# Altium PCB G4Mini-V3.PcbDoc
Units mil, origin at the board's own origin, x right, y up, seen from the top; angles counter-clockwise.
Board outline 2362.2 x 1259.84 mil, 4 copper layers (Top Layer, GND, PWR, Bottom Layer), stack 23.756 mil thick; 46 components, 54 nets, 268 pads, 175 vias.
Unrouted connection lines stored in the file: 18.
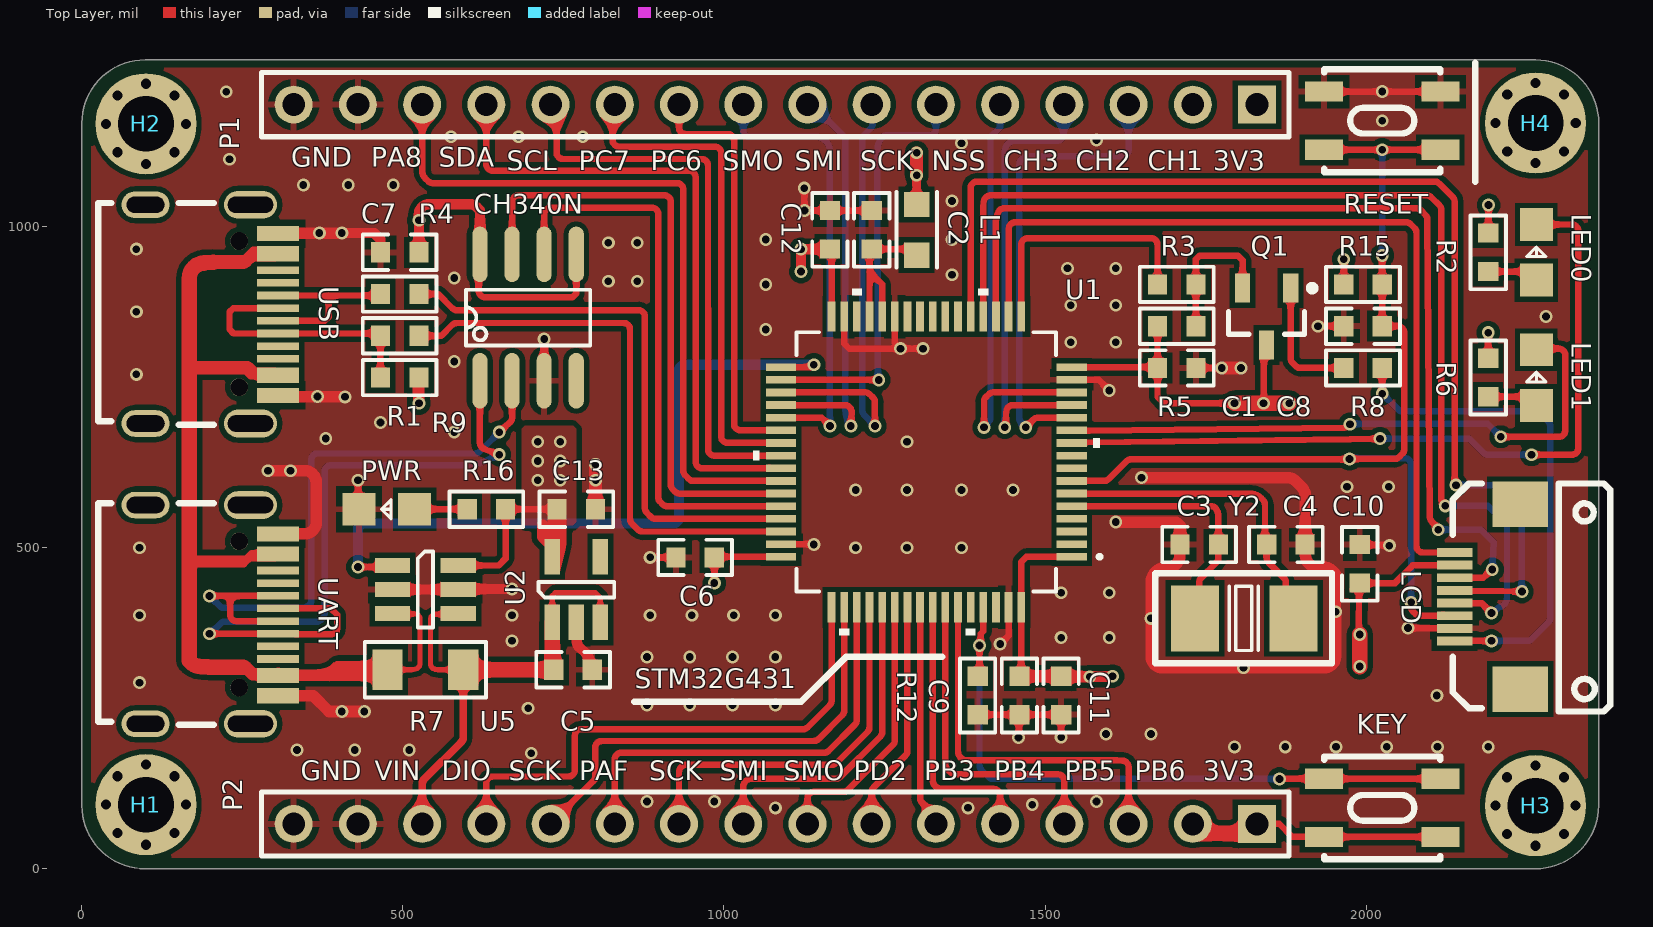
[diagram p0: Top Layer view]
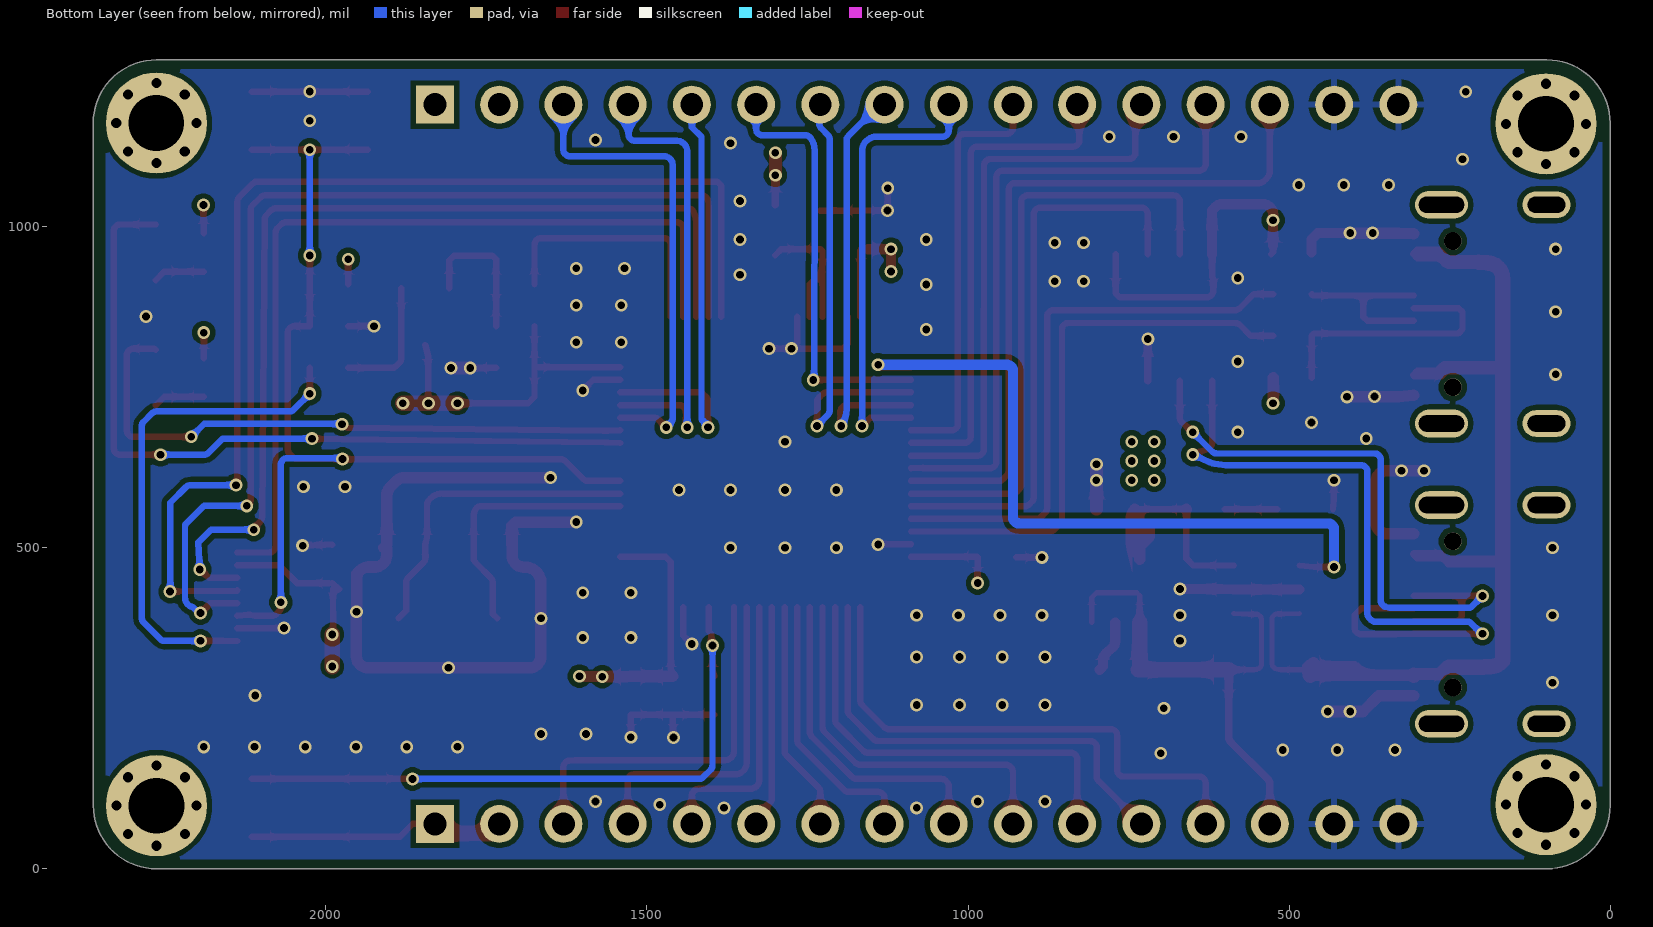
[diagram p1: Bottom Layer view, seen from below]
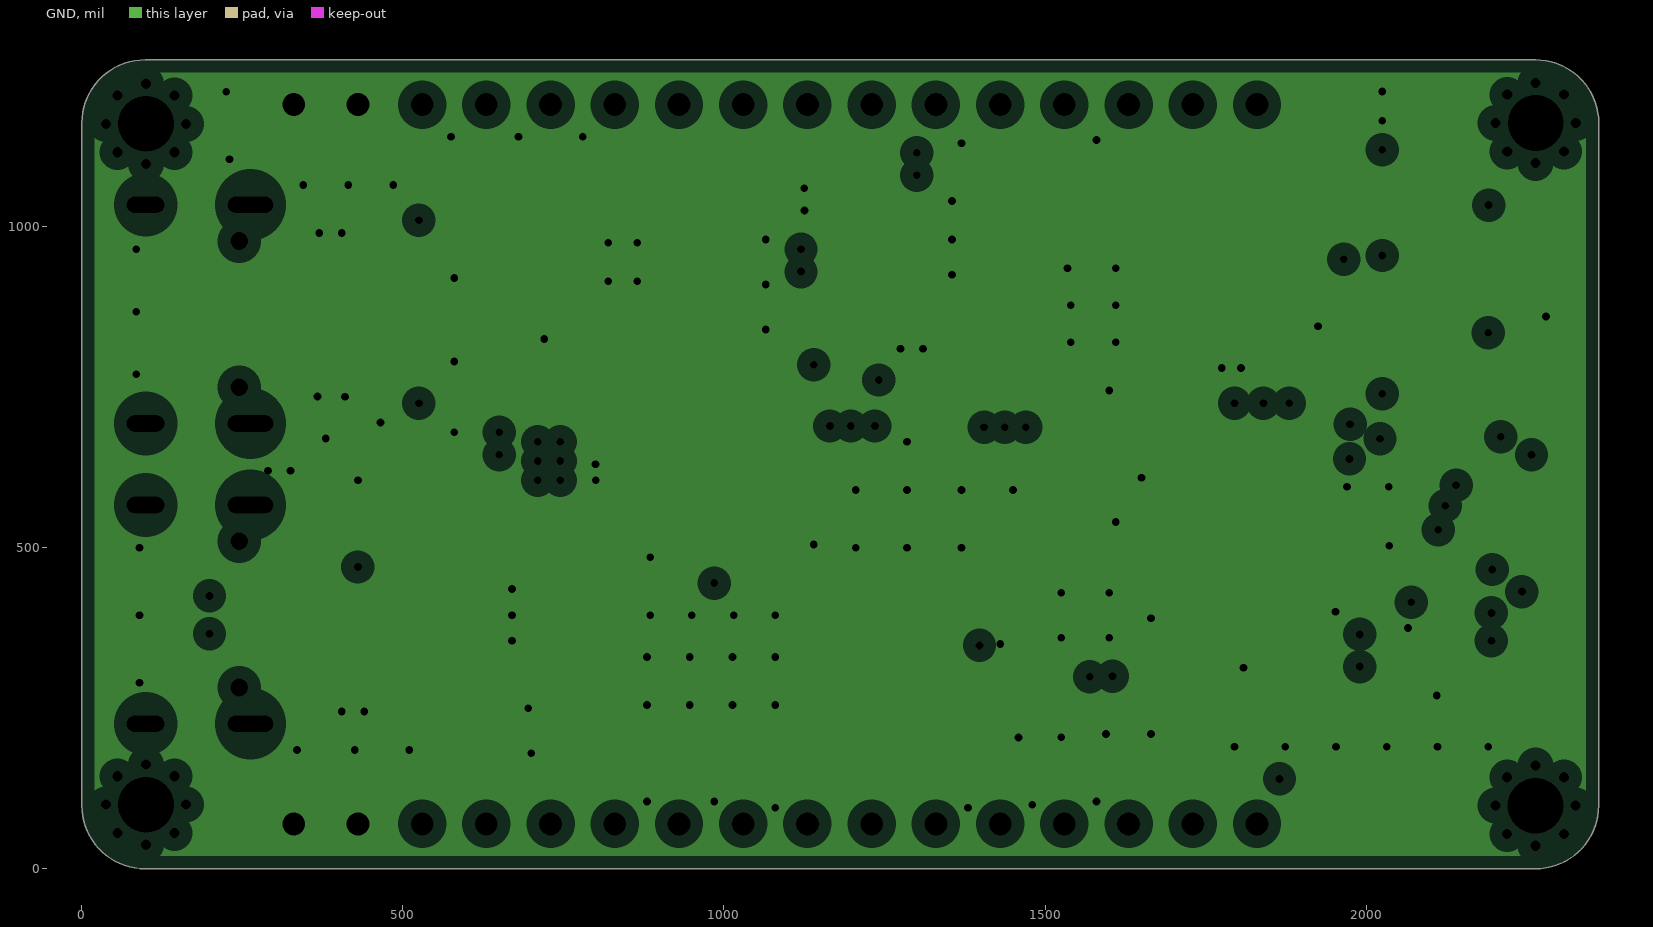
[diagram p2: GND, clearances drawn from the general rule]
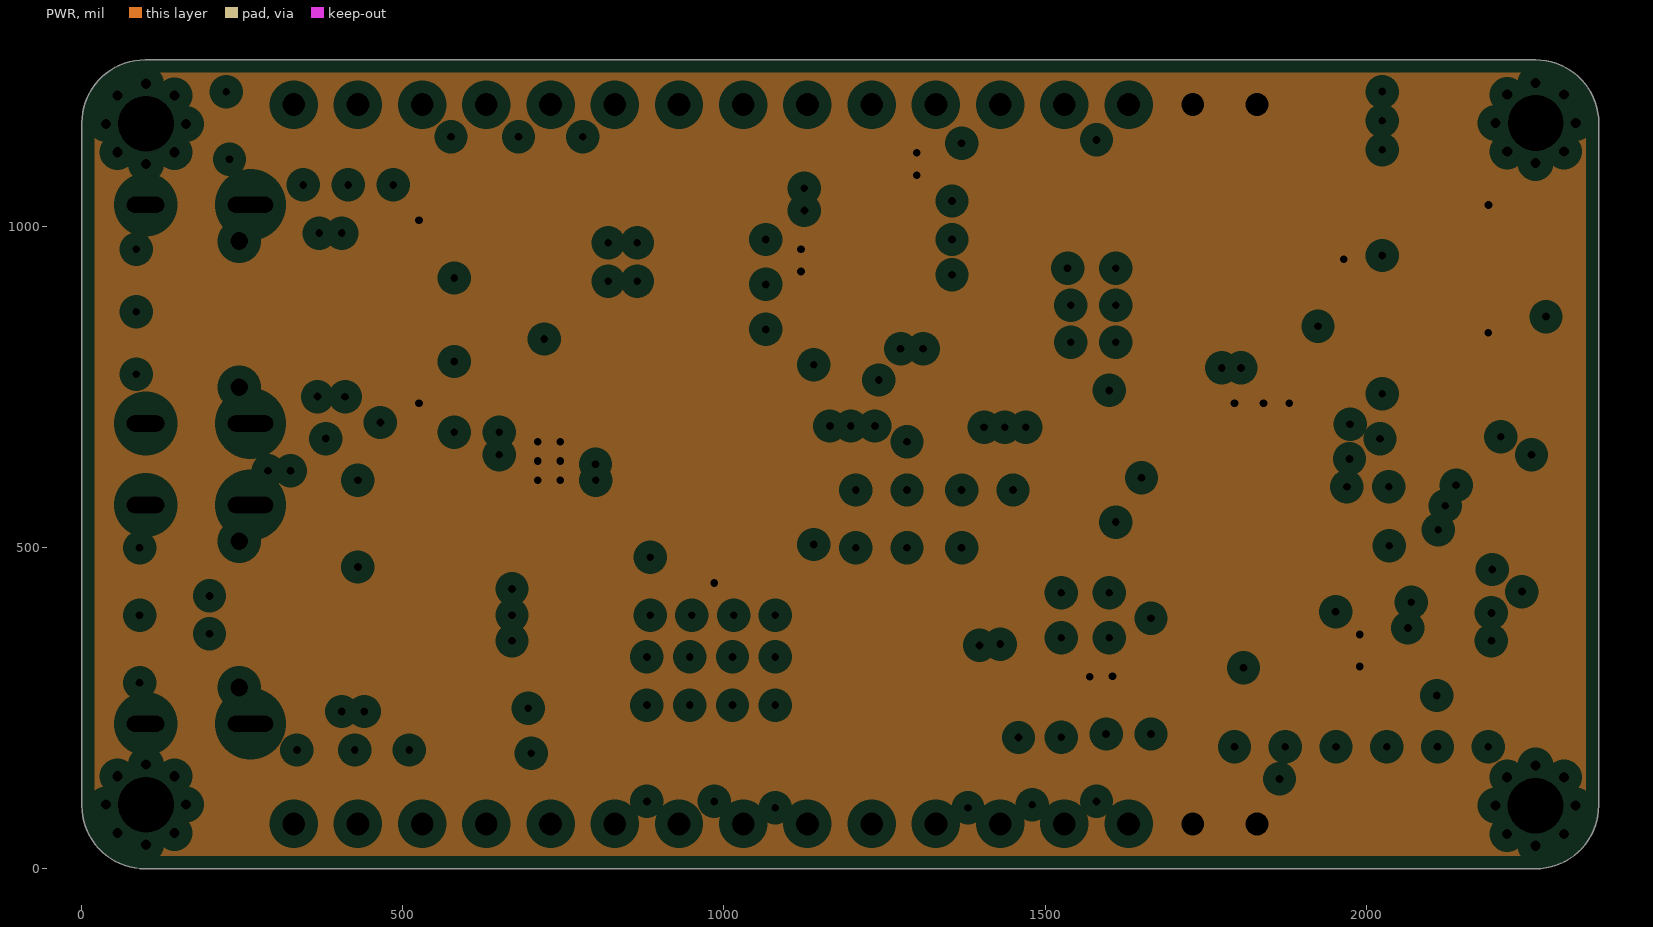
[diagram p3: PWR, clearances drawn from the general rule]
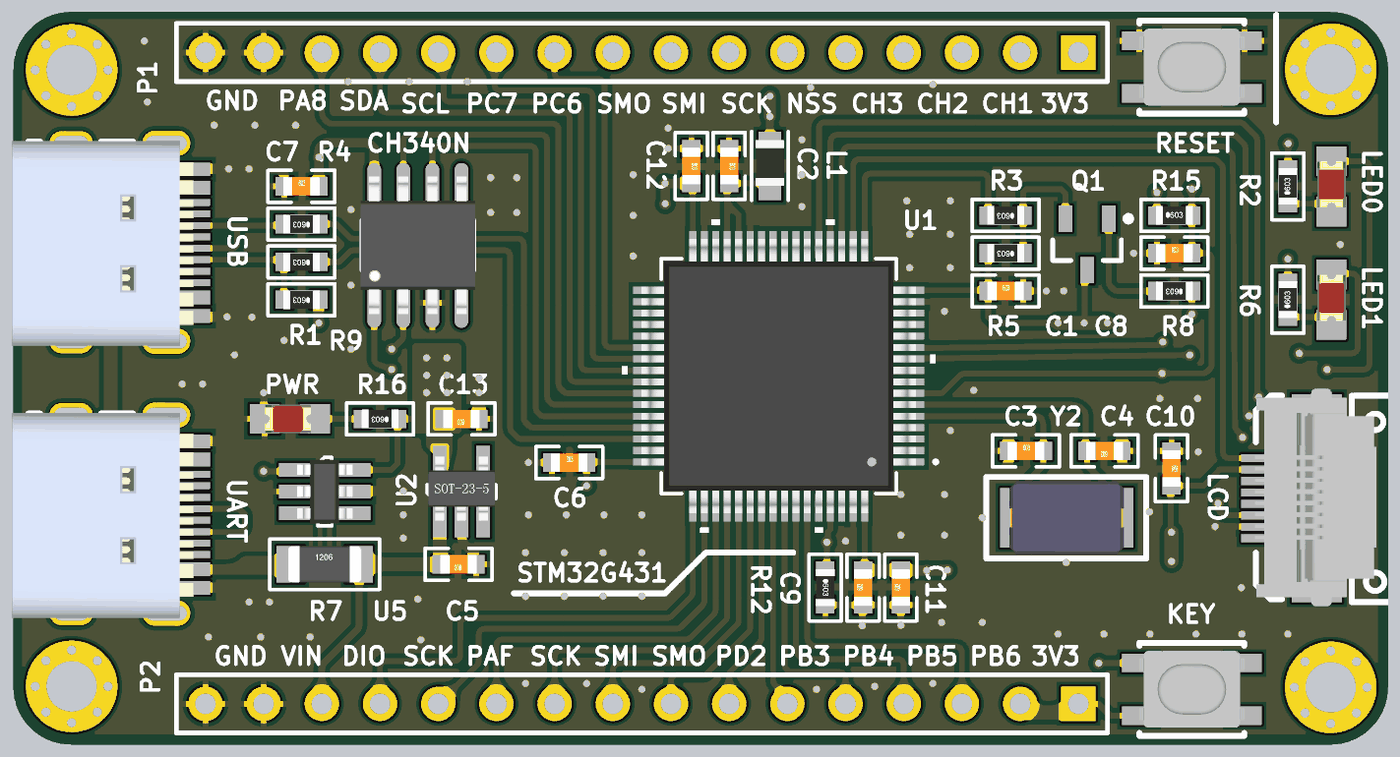
[diagram p4: 3D render of the assembled board from above, using the file's embedded part models]

## Layer stack, top to bottom
Top Solder: solder mask 0.4, Solder Resist, Dk 3.5
Top Layer: signal copper 1.4
Dielectric 2: prepreg 2.8, PP-006, Dk 4.1
GND: plane copper 1.378, net GND
Dielectric 1: dielectric 12.6, FR-4, Dk 4.8
PWR: plane copper 1.378, net VCC-3V3
Dielectric 3: prepreg 2.8, PP-006, Dk 4.1
Bottom Layer: signal copper 1.4
Bottom Solder: solder mask 0.4, Solder Resist, Dk 3.5

## Board outline
0.12,98.51 ccw(c98.43,98.51) 98.43,0.21 98.43,0 2263.69,0 2263.69,0.12 ccw(c2263.69,98.43) 2361.99,98.43 2362.2,98.43 2362.2,1161.33 2362.08,1161.33 ccw(c2263.78,1161.33) 2263.78,1259.63 2263.78,1259.84 98.51,1259.84 98.51,1259.72 ccw(c98.51,1161.42) 0.21,1161.42 0,1161.42

## Design rules (kind name [scope] priority, off if disabled: settings)
Clearance [All] p1: gap=8 ignorepadtopadclearanceinfootprint=TRUE except(0: Arc-Hole Track-Hole SMDPad-Hole THPad-Hole Via-Hole Fill-Hole Poly-Hole Region-Hole Text-Hole; 6: Arc-Arc Arc-Track Arc-SMDPad Arc-THPad Track-Track Track-SMDPad Track-THPad SMDPad-SMDPad SMDPad-THPad THPad-THPad)
MinimumSolderMaskSliver [All] p1: minsoldermaskwidth=6
PlaneClearance [All] p1: clearance=20
PlaneConnect [All] p1: planeconnectstyle=Direct reliefexpansion=20 reliefentries=4 reliefconductorwidth=10 reliefairgap=10
PolygonConnect PolygonConnect_GND [InNet('GND')] p1: thpad.connectstyle=Relief thpad.reliefconductorwidth=10 thpad.reliefentries=4 thpad.polygonreliefangle="90 Angle" thpad.airgapwidth=10 smdpad.connectstyle=Relief smdpad.reliefconductorwidth=10 smdpad.reliefentries=4 smdpad.polygonreliefangle="90 Angle" smdpad.airgapwidth=10 via.connectstyle=Direct via.reliefconductorwidth=10 via.reliefentries=4 via.polygonreliefangle="90 Angle" via.airgapwidth=10
PolygonConnect PolygonConnect_PWR [InNet('VCC-3V3')] p2: connectstyle=Direct reliefconductorwidth=10 reliefentries=4 polygonreliefangle="90 Angle" airgapwidth=10
PolygonConnect [All] p3: connectstyle=Relief reliefconductorwidth=10 reliefentries=4 polygonreliefangle="90 Angle" airgapwidth=10
RoutingVias [All] p1: holewidth=12 width=24 viastyle="Through Hole" minholewidth=12 minwidth=20 maxholewidth=24 maxwidth=48
SilkToSolderMaskClearance SilkToSolderMaskClearance_LED [HasFootprint('LED-0805')] p1: minsilkscreentomaskgap=6 clearancetoexposedcopper=TRUE
SilkToSolderMaskClearance [IsPad] p2: minsilkscreentomaskgap=8 clearancetoexposedcopper=TRUE
SolderMaskExpansion [All] p1: expansion=4 istentingtop=FALSE
Width Width_PWR [InNetClass('PWR')] p1: maxlimit=32 minlimit=8 preferedwidth=12 minimp=50.000000 maximp=50.000000 favimp=50.000000
Width [All] p2: maxlimit=12 minlimit=8 preferedwidth=10 minimp=50.000000 maximp=50.000000 favimp=50.000000
26 further rules are at their usual default settings.

## Classes and differential pairs
net class PWR: GND VCC-3V3 VCC-5V VCC-IN VOUT
component class STM32-Mentor: C1 C2 C3 C4 C5 C6 C7 C9 C10 C11 C12 C13 H1 H2 H3 H4 KEY L1 LCD LED0 LED1 P1 P2 PWR Q1 R1 R2 R3 R4 R5 R6 R7 R8 R9 R12 R15 R16 RESET U2 U5 UART USB Y2

## Components (designator, comment, footprint, x,y, rotation, side; value= is the part's Value field where it differs from the comment)
C1 "100nF(10%, 0603)" 0603C 1705,780 r0 top value=100pF
C2 "100nF(10%, 0603)" 0603C 1230,995 r270 top value=100pF
C3 "20pF(10%, 0603)" 0603C 1740,505 r0 top value=100pF
C4 "20pF(10%, 0603)" 0603C 1875,505 r180 top value=100pF
C5 "10uF(10%, 0603)" 0603C 765,310 r180 top value=104
C6 "100nF(10%, 0603)" 0603C 955,485 r0 top value=100pF
C7 "10uF(10%, 0603)" 0603C 495,960 r0 top value=106
C8 "105" 0603C 1995,845 r0 top
C9 "100nF(10%, 0603)" 0603C 1460,270 r90 top value=100pF
C10 "100nF(10%, 0603)" 0603C 1990,475 r270 top value=100pF
C11 "100nF(10%, 0603)" 0603C 1525,270 r90 top value=100pF
C12 "100nF(10%, 0603)" 0603C 1165,995 r270 top value=100pF
C13 "100nF(10%, 0603)" 0603C 770,560 r180 top value=100pF
CH340N "CH340N" SOP8 695,858.43 r0 top
H1 "M2-Hole" M2-Hole 100,100 r0 top
H2 "M2-Hole" M2-Hole 100,1160 r0 top
H3 "M2-Hole" M2-Hole 2263.69,98.43 r0 top
H4 "M2-Hole" M2-Hole 2263.78,1161.33 r0 top
KEY "SW-PB" SW2-4R2X3R4 2025,95 r0 top
L1 "Inductor" 0805L 1300,995 r270 top value="10mH(10%, 0603)"
LCD "FPC-8P-0R5" FPC-8P-0R5 2235,375 r90 top
LED0 "LED0" LED-0805 2265,960 r270 top
LED1 "LED0" LED-0805 2265,765 r270 top
P1 "Header 16" HDR1X16 1830,1190 r180 top
P2 "Header 16" HDR1X16 1830,70 r180 top
PWR "LED0" LED-0805 475,560 r0 top
Q1 "S8550" SOT-23B_N 1845,860 r270 top
R1 "1K(1%, 0603)" 0603R 495,765 r0 top value=1K
R2 "1K(1%, 0603)" 0603R 2190,960 r270 top value=1K
R3 "1K(1%, 0603)" 0603R 1705,910 r0 top value=1K
R4 "22R(1%, 0603)" 0603R 495,830 r0 top value=1K
R5 "10K(1%, 0603)" 0603R 1705,845 r0 top value=1K
R6 "1K(1%, 0603)" 0603R 2190,765.08 r270 top value=1K
R7 "0.5R(1%, 1206)" 1206R 535,310 r0 top value=1K
R8 "5R(1%, 0603)" 0603R 1995,780 r0 top value=1K
R9 "22R(1%, 0603)" 0603R 495,895 r0 top value=1K
R12 "10K(1%, 0603)" 0603R 1395,270 r90 top value=1K
R15 "10K(1%, 0603)" 0603R 1995,910 r180 top value=1K
R16 "1K(1%, 0603)" 0603R 630,560 r0 top value=1K
RESET "SW-PB" SW2-4R2X3R4 2025,1165 r180 top
U1 "STM32G431RBT6" LQFP64-10x10mm 1315.16,633.62 r180 top
U2 "XC6219" SOT23-5 770,435 r0 top
U5 "INA181A2" SOT23-6 535,435 r270 top
UART "USB-TYPEC-16P" USB-TYPEC-16P 205.72,379.22 r270 top locked
USB "USB-TYPEC-16P" USB-TYPEC-16P 205.72,846.78 r270 top locked
Y2 "8MHz(SMD5032)" SMD5032-2P 1810,390 r180 top

## Footprints (in the part's own frame and the unit in brackets; to place one, negate y for a bottom-side part, rotate by r counter-clockwise, add the part's x,y. Pads: shape width x height; smd on the part's side, far side on the other; paste and mask are expansions set on the pad)
0603C [mm]
  rect 0.76x0.8 smd: 1(-0.76,0) 2(0.76,0)
  silkscreen extent -1.46,-0.7 1.46,0.7, body extent -0.8,-0.4 0.8,0.4, height 0.3
0603R [mm]
  rect 0.76x0.8 smd: 1(-0.76,0) 2(0.76,0)
  silkscreen extent -1.46,-0.7 1.46,0.7, body extent -0.8,-0.41 0.8,0.41, height 0.45
0805L [mm]
  rect 1x1 smd: 1(-1,0) 2(1,0)
  silkscreen extent -1.5,-0.8 1.5,0.8, body extent -1.13,-0.63 0.87,0.63, height 0.5
1206R [mm]
  rect 1.2x1.6 smd: 1(-1.5,0) 2(1.5,0)
  silkscreen extent -2.4,-1.1 2.4,1.1, body extent -1.6,-0.8 1.6,0.8, height 1
FPC-8P-0R5 [mm] "FPC connector of 8Pin, and 0.5mm pin"
  rect 0.35x1.4 smd: 1(-0.513,2.473) 2(-0.013,2.473) 3(0.487,2.473) 4(0.987,2.473) 5(1.487,2.473) 6(1.987,2.473) 7(2.487,2.473) 8(2.987,2.473)
  rect 1.8x2.2 smd: 9(-2.413,-0.127) 10(4.887,-0.127)
  silkscreen extent -3.3,-3.68 5.71,2.54, body extent -3.48,-2.72 6.02,2.58, height 1.88
HDR1X16 [mm] "Connector; Header; 16 Position"
  rect 1.5x1.5 hole 0.9: 1(0,0)
  round 1.5 hole 0.9: 2(2.54,0) 3(5.08,0) 4(7.62,0) 5(10.16,0) 6(12.7,0) 7(15.24,0) 8(17.78,0) 9(20.32,0) 10(22.86,0) 11(25.4,0) 12(27.94,0) 13(30.48,0) 14(33.02,0) 15(35.56,0) 16(38.1,0)
  silkscreen extent -1.27,-1.27 39.37,1.27
LED-0805 [mm]
  rect 1.3x1.3 smd: 1(1.1,0) 2(-1.1,0)
  silkscreen extent -0.21,-0.38 0.17,0.38, body extent -1.09,-0.63 0.93,0.63, height 1.1
LQFP64-10x10mm [mil]
  rect 47x12 smd paste+0 mask+0: 1(-226.38,147.64) 2(-226.38,127.95) 3(-226.38,108.27) 4(-226.38,88.58) 5(-226.38,68.9) 6(-226.38,49.21) 7(-226.38,29.53) 8(-226.38,9.84) 9(-226.38,-9.84) 10(-226.38,-29.53) 11(-226.38,-49.21) 12(-226.38,-68.9) 13(-226.38,-88.58) 14(-226.38,-108.27) 15(-226.38,-127.95) 16(-226.38,-147.64) 33(226.38,-147.64) 34(226.38,-127.95) 35(226.38,-108.27) 36(226.38,-88.58) 37(226.38,-68.9) 38(226.38,-49.21) 39(226.38,-29.53) 40(226.38,-9.84) 41(226.38,9.84) 42(226.38,29.53) 43(226.38,49.21) 44(226.38,68.9) 45(226.38,88.58) 46(226.38,108.27) 47(226.38,127.95) 48(226.38,147.64)
  rect 12x47 smd paste+0 mask+0: 17(-147.64,-226.38) 18(-127.95,-226.38) 19(-108.27,-226.38) 20(-88.58,-226.38) 21(-68.9,-226.38) 22(-49.21,-226.38) 23(-29.53,-226.38) 24(-9.84,-226.38) 25(9.84,-226.38) 26(29.53,-226.38) 27(49.21,-226.38) 28(68.9,-226.38) 29(88.58,-226.38) 30(108.27,-226.38) 31(127.95,-226.38) 32(147.64,-226.38) 49(147.64,226.38) 50(127.95,226.38) 51(108.27,226.38) 52(88.58,226.38) 53(68.9,226.38) 54(49.21,226.38) 55(29.53,226.38) 56(9.84,226.38) 57(-9.84,226.38) 58(-29.53,226.38) 59(-49.21,226.38) 60(-68.9,226.38) 61(-88.58,226.38) 62(-108.27,226.38) 63(-127.95,226.38) 64(-147.64,226.38)
  silkscreen extent -273,-270 270,270, body extent -236,-236 236,236, height 63
M2-Hole [mm] "5mm~2.5mm"
  round 0.8 hole 0.4: 4(0,1.587) 5(1.123,1.123) 6(1.587,0) 7(1.123,-1.123) 8(0,-1.587) 9(-1.123,-1.123) 10(-1.587,0) 11(-1.123,1.123)
  round 4 hole 2.2 unplated: 12(0,0)
SMD5032-2P [mm] "Ctrystal, 2-Pin, package with 5032"
  rect 1.9x2.6 smd: 1(-1.95,0) 2(1.95,0)
  silkscreen extent -3.47,-1.78 3.51,1.78, body extent -2.5,-1.6 2.5,1.6, height 1.3
SOP8 [mm]
  oval 0.6x2.2 smd: 1(-1.905,-2.5) 2(-0.635,-2.5) 3(0.635,-2.5) 4(1.905,-2.5) 5(1.905,2.5) 6(0.635,2.5) 7(-0.635,2.5) 8(-1.905,2.5)
  silkscreen extent -2.46,-1.1 2.46,1.1, body extent -2.5,-3 2.5,3, height 1.8
SOT23-5 [mm]
  rect 0.6x1.4 smd: 1(-0.95,-1.3) 2(0,-1.3) 3(0.95,-1.3) 4(0.95,1.3) 5(-0.95,1.3)
  silkscreen extent -1.5,-0.31 1.5,0.3, body extent -1.45,-1.27 1.45,1.53, height 1.2
SOT23-6 [mm]
  rect 0.6x1.4 smd: 1(-0.95,-1.3) 2(0,-1.3) 3(0.95,-1.3) 4(0.95,1.3) 5(0,1.3) 6(-0.95,1.3)
  silkscreen extent -1.5,-0.3 1.5,0.3, body extent -1.4,-1.21 1.4,1.21, height 1.09
SOT-23B_N [mm] "SOT23, 3-Leads, Body 2.9x1.3mm, Pitch 0.95mm, Lead Span 2.4mm, IPC Medium Density"
  rect 1.15x0.6 smd: 1(-1.125,0.95) 2(-1.125,-0.95) 3(1.125,0)
  silkscreen extent -1.25,-1.5 0.7,1.93, body extent -0.7,-1.5 0.7,1.5, height 1.14
SW2-4R2X3R4 [mm] "TS3425 Shouhan"
  rect 1.5x0.8 smd: 1(-2.3,-1.15) 1(2.3,-1.15) 2(-2.3,1.15) 2(2.3,1.15)
  silkscreen extent -2.29,-2.03 2.29,2.03, body extent -2.3,-1.68 2.3,1.68, height 2.5
USB-TYPEC-16P [mm]
  oval 1.1x2.1 hole 0.65 slot 1.8 at 90 deg mask+0.051: 13(-4.757,1.448) 15(3.893,1.448)
  oval 1.05x1.9 hole 0.65 slot 1.5 at 90 deg mask+0.051: 14(-4.757,-2.702) 16(3.893,-2.702)
  round 0.7 hole 0.7 unplated mask+0.102: 22(-3.322,0.998) 23(2.458,0.998)
  rect 0.6x1.651 smd: A1B12(-3.617,2.54) A4B9(-2.817,2.54) A9B4(1.983,2.54) A12B1(2.783,2.54)
  rect 0.3x1.651 smd: A5(-1.667,2.54) A6(-0.667,2.54) A7(-0.167,2.54) A8(0.833,2.54) B5(1.333,2.54) B6(0.333,2.54) B7(-1.167,2.54) B8(-2.167,2.54)
  silkscreen extent -4.83,-4.57 3.94,0, body extent -4.85,-5.27 4.09,2.63, height 3.26

## Part data
C1 C2 C3 C4 C5 C6 C7 C8 C9 C10 C11 C12 C13: library part Cap, "Capacitor", LatestRevisionDate=17-Jul-2002, LatestRevisionNote="Re-released for DXP Platform.", PackageDescription="Radial Cap, Thru-Hole; 2 Leads; 0.3 in Pin Spacing", PackageReference=RAD-0.3, Published=8-Jun-2000, Publisher="Altium Limited"
CH340N: "UART To USB"
KEY RESET: "Switch", LatestRevisionDate=17-Jul-2002, LatestRevisionNote="Re-released for DXP Platform.", PackageDescription="Switch; 2 Leads", PackageReference=SPST-2, Published=24-Mar-1999, Publisher="Altium Limited"
LED0 LED1 PWR: "Typical INFRARED GaAs LED", LatestRevisionDate=08-Jul-2005, LatestRevisionNote="Mech Layer 1 removed.", PackageDescription="LED; 2 Leads", PackageReference=LED-0, Published=8-Jun-2000, Publisher="Altium Limited"
P1 P2: "Header, 16-Pin", LatestRevisionDate=17-Jul-2002, LatestRevisionNote="Re-released for DXP Platform.", Publisher="Altium Limited"
Q1: library part PNP, "PNP Bipolar Transistor", LatestRevisionDate=29-May-2009, LatestRevisionNote="IPC-7351 Footprint Added.", PackageDescription="3-Pin SOT-23 Package 0.95 mm Pitch, 2.4 mm Lead Span", PackageReference=SOT-23B, PackageVersion=Aug-1999, Published=8-Jun-2000, Publisher="Altium Limited"
R1 R2 R3 R4 R5 R6 R7 R8 R9 R12 R15 R16: library part Res1, "Resistor", LatestRevisionDate=17-Jul-2002, LatestRevisionNote="Re-released for DXP Platform.", PackageDescription="Axial Device, Thru-Hole; 2 Leads; 0.3 in Pin Spacing", PackageReference=AXIAL-0.3, Published=8-Jun-2000, Publisher="Altium Limited"
U1: "No Description Available", Mfr_Name=STMicroelectronics, Copyright="Copyright (C) 2024 Ultra Librarian. All rights reserved.", Manufacturer_Part_Number=STM32G431RBT6, RefDes=RefDes, Type=DEV
U2: "POWER: LDO regulator for 3V3"
U5: "Amp: current amplifire"
Y2: library part XTAL, "Crystal Oscillator", LatestRevisionDate=17-Jul-2002, LatestRevisionNote="Re-released for DXP Platform.", PackageDescription="Crystal, Thru-Hole; 2 Leads; Body 3.1 x 8.2 mm (Dia.xH)", PackageReference=R38, Published=8-Jun-2000, Publisher="Altium Limited"
L1: Code_IEC=1005, Code_JEITA=0402, LatestRevisionDate=29-May-2009, LatestRevisionNote="IPC-7351 Footprint Added.", PackageDescription="Chip Inductor", PackageReference=0402-A, Published=8-Jun-2000, Publisher="Altium Limited"

## Via types
v1: diameter 20, hole 12, Top Layer to Bottom Layer, tented both sides, 175 vias

## Nets (pads, with @x,y where several pads share a name; then routed paths per layer and width w, separated by ;. In a path a pad name is that pad's centre, name@x,y a point inside that pad or via, vN(x,y) a via of type N, cw(c..) or ccw(c..) an arc to the next point about the centre after c; other vN are vias at no path point)
BOOT0: KEY.2 R12.2 U1.61 | length 1024.8
  Top Layer w10: R12.2 1397.93,309.88 v1(1397.93,347.93) 1399.84,349.84 1399.84,366.1 1403.74,370 U1.61 ; v1(1865,140) 1878.04,140.4 cw(c1878.35,130.4) 1878.37,140.4 ; 1878.4,140.4 1909.92,140.33 1934.45,140.28 KEY.2@2115.55,140.28
  Bottom Layer w10: v1(1397.93,347.93) 1397.93,161.21 ccw(c1407.93,161.21) 1400.84,154.16 1412.11,142.89 ccw(c1419.14,150) 1419.1,140 v1(1865,140)
CH340+: CH340N.1 UART.A6 UART.B6 | length 1150
  Top Layer w10: v1(198.97,366.11) UART.B6 333.22,365.33 387.93,365.33 ccw(c387.93,375.33) 397.93,375.33 397.93,395.48 387.93,405.48 UART.A6 ; CH340N.1 620,663.27 ccw(c630,663.27) 621.83,657.5 ccw(c630,663.27) 626.46,653.92 v1(650,645)
  Bottom Layer w10: v1(198.97,366.11) 199.42,366.3 ccw(c195.53,375.51) 202.58,368.42 216.2,382.04 cw(c223.27,374.97) 223.27,384.97 365.78,384.97 ccw(c365.78,394.97) 372.84,387.88 375.16,390.2 ccw(c368.07,397.26) 378.07,397.26 378.07,618.49 cw(c388.07,618.49) 388.07,628.49 597.49,628.49 ccw(c597.49,638.49) 598.86,628.59 616.16,630.98 ccw(c612.59,656.74) 623.22,633.01 v1(650,645)
CH340-: CH340N.2 UART.A7 UART.B7 | length 1007.4
  Top Layer w10: v1(198.97,425) 220.69,425 220.86,425.17 230.93,425.17 ; UART.A7 240.89,385.8 cw(c240.93,395.8) 230.93,395.75 230.93,425.17 ; UART.B7 230.93,425.17 ; v1(650,680) 666.68,694.99 ccw(c660,702.43) 670,702.43 CH340N.2
  Bottom Layer w10: v1(198.97,425) 214.68,409.29 ccw(c221.75,416.36) 221.75,406.36 337.21,406.36 ccw(c337.21,459.25) 349.51,407.81 349.57,407.83 ccw(c347.18,417.54) 357.18,417.49 357.18,636.78 cw(c367.18,636.74) 367.14,646.73 612.59,646.74 ccw(c612.59,656.74) 619.66,649.66 v1(650,680)
GND: C1.2 C2.1 C3.1 C4.1 C5.1 C6.1 C7.1 C8.1 C9.1 C10.1 C11.1 C12.1 C13.1 CH340N.3 LCD.2 P1.15 P1.16 P2.15 P2.16 PWR.2 R12.1 RESET.1 U1.15 U1.27 U1.31 U1.47 U1.63 U2.2 U5.2 U5.5 UART.A1B12 UART.A12B1 USB.A1B12 USB.A12B1 | length 3479.8
  Top Layer w10: v1(430,605) 430.43,575.67 ccw(c440.43,575.82) 430.46,575 PWR.2 ; v1(885,485) C6.1 ; U1.47 1139.33,505.67 v1(1140,505) ; v1(1125,1060) 1125.29,1059.71 v1(1125.29,1025.12) 1154.25,1025.12 C12.1 C2.1 ; U1.31 1187.21,817.79 1195,810 v1(1275,810) ; U1.27 1265.95,819.05 v1(1275,810) ; v1(1310,810) v1(1275,810) ; R12.1 C9.1 ; v1(1430,350) 1443.11,363.11 U1.63 ; v1(1458.58,204.47) 1459.59,229.68 ccw(c1449.59,230.08) 1459.59,230.08 C9.1 ; v1(1525,205) C11.1 C9.1 ; U1.15 1583.43,761.57 v1(1600,745) ; C1.2 v1(1775,780) ; v1(1925,845) C8.1 ; RESET.1@1934.45,1210.28 RESET.1@2115.55,1210.28 ; C10.1 C10.1@2000.71,505 ; C10.1@2000.75,505 cw(c2000.78,495) 2001.27,504.99 v1(2036.09,503.31) ; v1(2065,375) 2065.26,374.74 2137.38,374.74 LCD.2
  Top Layer w12: CH340N.3 v1(720,825)
  Top Layer w16: v1(405,990) 455.71,990 465.08,980.63 C7.1 ; U5.2 U5.5 605.74,435.92 v1(670,435.92) ; U2.2@770.53,383.29 770.53,355.87 ccw(c786.53,355.93) 775.75,344.11 784.83,335.81 cw(c774.04,324) C5.1@789.98,325.36 ; C5.1@789.99,325.32 789.99,314.94 C5.1
  Top Layer w18: v1(290,620) v1(325,620) 347,620 cw(c347,602) 365,602.06 365,539.62 cw(c347,539.62) 347,521.62 UART.A1B12 ; UART.A12B1 360.35,269.65 385,245 v1(440,245) ; USB.A12B1 329.22,735.39 v1(367.12,735.39) cw(c367.12,717.39) 367.28,735.39 v1(410,735) ; USB.A1B12 329.22,990 v1(370,990) v1(405,990) ; v1(1610,540) 1704.22,540 1710.08,534.14 C3.1 1710,504.92 1710,487.86 cw(c1692,487.86) 1692.06,469.86 1689.46,469.86 ccw(c1689.46,445.43) 1665.03,445.53 1665.03,445.44 v1(1665,390) 1665,331.07 ccw(c1683,331.07) 1683,313.07 v1(1808.96,313.07) 1934.3,313.07 ccw(c1934.3,331.07) 1952.3,331.01 1952.3,331.07 v1(1952.3,400.23) ; v1(1650.12,609.19) 1877.52,609.19 cw(c1877.52,591.19) 1890.25,603.92 1899.65,594.52 cw(c1886.92,581.79) 1904.92,581.79 C4.1@1904.92,505.79 ; C4.1@1909.91,500.01 1905.32,498.25 1905.32,488 ccw(c1923.32,488) 1923.26,470 1933.72,470 cw(c1933.72,452) 1946.33,464.84 1951.72,459.46 v1@1951.72,400.29
  Top Layer w20: C13.1 799.92,604.89 v1(800.18,605.15) v1(800,630) ; v1(1775,780) v1(1805,780)
  other v1: 1080,95 1380,95 1480,100 880,105 985,105 1580,105 700,180 335,185 425,185 510,185 1795,190 1874,190 1953,190 2032,190 2111,190 2190,190 1595,210 1665,210 405,245 695,250 880,255 946.67,255 1013.33,255 1080,255 2110,270 90,290 880,330 946.67,330 1013.33,330 1080,330 670,355 1525,360 1600,360 90,395 670,395 885,395 950,395 1015,395 1080,395 1525,430 1600,430 90,500 1205,500 1285,500 1370,500 1205,590 1285,590 1370,590 1450,590 1970,595 2035,595 1285,665 380,670 580,680 465,695 85,770 580,790 1540,820 1610,820 1065,840 2280,860 85,867.5 1540,877.5 1610,877.5 1065,910 820,915 865,915 580,920 1355,925 1535,935 1610,935 85,965 820,975 865,975 1065,980 1355,980 1355,1040 345,1065 415,1065 485,1065 230,1105 1370,1130 1580,1135 575,1140 680,1140 780,1140 2025,1165 225,1210 2025,1210.28
I2C2-SCL: P1.12 U1.40 | length 901.4
  Top Layer w10: P1.12@730,1205 736.46,1198.54 cw(c729.39,1191.47) 739.39,1191.47 739.39,1115.29 ccw(c749.39,1115.29) 749.39,1105.29 965.06,1105.29 cw(c965.06,1095.29) 975.06,1095.27 975.18,653.45 ccw(c985.18,653.46) 985.12,643.46 U1.40
I2C2-SDA: P1.13 U1.41 | length 1028.2
  Top Layer w10: P1.13@630,1205 630,1097.16 ccw(c640,1097.16) 639.96,1087.16 945.81,1087.16 cw(c945.81,1077.16) 955.81,1077.12 955.81,633.74 ccw(c965.81,633.78) 965.81,623.78 U1.41@1070.24,623.78 ; U1.41@1070.28,623.78 1070.28,624.78 U1.41
LCD_CLK: LCD.6 U1.19 | length 1531
  Top Layer w10: U1.19 1423.43,1006.87 ; 1423.43,1006.92 cw(c1458.49,1006.92) 1427.45,1023.23 cw(c1436.28,1018.53) 1436.28,1028.53 2078.06,1028.53 cw(c2078.06,1018.53) 2085.3,1025.44 2092.61,1017.84 cw(c2085.4,1010.91) 2095.4,1011.02 2099.27,547.8 ccw(c2109.26,547.9) 2102.16,540.87 ; 2102.19,540.83 2112.18,530.85 v1(2112.18,528.14) ; LCD.6 2182.22,453.23 2192.77,463.78 cw(c2199.84,456.71) v1@2196.24,466.04
  Bottom Layer w10: v1(2112.18,528.14) 2178.65,528.14 2198.37,508.42 v1(2196.27,466.05)
LCD_CS: LCD.8 U1.18 | length 1338.7
  Top Layer w10: U1.18 1443.11,878.5 1443.11,994.04 cw(c1463.95,994.09) 1443.79,999.39 cw(c1453.46,996.8) 1453.41,1006.8 2062.2,1006.8 cw(c2062.2,996.8) 2069.3,1003.84 2075.43,997.72 cw(c2068.35,990.65) 2078.35,990.65 2078.35,502.55 ccw(c2088.35,502.6) 2088.31,492.6 LCD.8
LCD_DC: LCD.4 U1.20 | length 1701.9
  Top Layer w10: U1.20 1403.74,1032.31 cw(c1432.41,1032.4) 1405.37,1041.94 cw(c1414.79,1038.56) 1414.79,1048.56 2094.47,1048.56 cw(c2094.47,1038.56) 2101.5,1045.67 2114.09,1033.08 cw(c2107,1026.03) 2117,1026.07 2117,575.48 ccw(c2127,575.48) 2119.91,568.43 v1(2123.07,565.27) ; LCD.4 2179.62,413.86 v1@2189.69,403.79 ; v1(2195,398.48) v1@2189.69,403.79 ; v1@2197.83,398.48 2195.85,399.78 v1@2189.69,403.79
  Bottom Layer w10: v1(2123.07,565.27) 2189.58,565.27 2219.14,535.71 2219.27,529.98 2219.27,422.02 cw(c2205.2,422.02) 2216.1,413.12 cw(c2203.18,423.67) 2208.54,407.87 ccw(c2211.78,398.41) 2204.75,405.52 2197.71,398.48 v1(2195,398.48)
LCD_EN: R3.1 U1.17 | length 397.7
  Top Layer w10: U1.17 1462.8,972.05 cw(c1472.8,972) 1472.75,982 1665.08,982 cw(c1665.08,972) 1675.08,972 1675.08,920.75 R3.1
LCD_MOSI: LCD.5 U1.21 | length 1772.2
  Top Layer w10: U1.21 1384.06,1059.1 cw(c1401.56,1059.16) 1384.21,1061.48 cw(c1394.12,1060.13) 1394.12,1070.13 2106.63,1070.13 cw(c2106.63,1060.13) 2113.7,1067.2 2134.67,1046.23 cw(c2127.6,1039.16) 2137.6,1039.16 2137.64,603.85 ccw(c2147.64,603.9) v1(2140,597.45) ; LCD.5 2138.54,432.64 2212.47,432.64 cw(c2212.47,422.64) 2212.77,432.63 v1(2242.47,431.73)
  Bottom Layer w10: v1(2140,597.45) 2210.55,597.45 cw(c2210.55,587.45) 2217.62,594.52 2242.14,570 v1@2242.14,432.06
LED0: LED0.2 U1.10 | length 1213.8
  Top Layer w10: U1.10 1560.04,663.83 1565.04,663.83 ccw(c1565.04,676.83) 1565.16,663.83 1975.26,669.23 v1(2021.45,669.88) ; v1(2257.47,644.85) 2320.2,644.85 ccw(c2320.2,654.85) 2330.2,654.85 2330.2,993.35 ccw(c2320.2,993.31) 2320.2,1003.31 LED0.2
  Bottom Layer w10: v1(2021.45,669.88) cw(c2022.99,660) 2022.95,670 2160.36,670 2182.61,647.75 ccw(c2189.65,654.85) 2189.6,644.85 v1(2257.47,644.85)
LED1: LED1.2 U1.11 | length 953.2
  Top Layer w10: U1.11 1560.04,682.15 1565.04,682.15 cw(c1565.04,669.15) 1567.06,681.99 ccw(c1568.54,691.88) 1568.62,681.88 1965.92,687.11 ccw(c1965.72,697.11) v1@1972.92,690.16 ; v1@1972.94,690.19 v1(1974.9,692.23) ; v1(2209.58,672.79) 2300,672.79 ccw(c2300,682.79) 2310,682.79 2310,777.89 ccw(c2300,777.89) 2310,777.95 2309.96,800.02 ccw(c2299.96,800) 2299.96,810 2266.69,810 LED1.2
  Bottom Layer w10: v1(1974.9,692.23) 1975.67,693 2189.37,693 v1(2209.58,672.79)
LEDA: LCD.1 R8.2 | length 787.6
  Top Layer w10: R8.2@2024.92,769.97 v1(2025,740) ; R8.2@2024.92,770 R8.2 ; LCD.1 2160.2,355 v1(2195,355)
  Bottom Layer w10: v1(2025,740) 2049.76,715.24 ccw(c2056.83,722.31) 2056.83,712.31 2263.54,712.31 cw(c2263.54,702.31) 2270.61,709.39 2283.66,696.34 cw(c2276.59,689.27) 2286.59,689.27 2286.59,390.73 cw(c2276.59,390.73) 2283.66,383.66 2257.93,357.93 cw(c2250.86,365) 2250.86,355 v1(2195,355)
M1-CH1: P1.3 U1.12 | length 758.7
  Top Layer w10: v1(1469.85,687.42) 1482.03,699.61 cw(c1489.09,692.52) 1489.09,702.52 U1.12
  Bottom Layer w10: 1460,1096.14 1460,701.41 ccw(c1470,701.41) 1462.93,694.34 v1(1469.85,687.42) ; 1460,1096.18 cw(c1473.38,1096.12) 1473.38,1109.5 1473.47,1109.5 1620.03,1109.5 ccw(c1620,1119.5) 1630,1119.5 P1.3@1630,1205
M1-CH2: P1.4 U1.13 | length 724.2
  Top Layer w10: v1@1437.19,690.25 1438.23,692.57 ccw(c1429.1,696.66) 1439.1,696.66 1439.1,707.77 cw(c1459.5,707.82) 1441.04,716.48 cw(c1450.07,712.2) 1450.03,722.2 U1.13
  Bottom Layer w10: v1@1437.19,690.77 1437.19,1117.66 cw(c1447.19,1117.61) 1437.2,1118.04 cw(c1453.54,1117.29) 1453.53,1133.65 1518.57,1133.65 ccw(c1518.57,1143.65) 1528.57,1143.65 1528.57,1199.84 cw(c1538.57,1199.84) P1.4@1530,1205
  other v1: 1437.19,687.42
M1-CH3: P1.5 U1.14 | length 712.2
  Top Layer w10: v1(1405,687.42) 1405,727.75 cw(c1415,727.75) 1407.91,734.81 1412.08,738.98 cw(c1419.14,731.89) 1419.14,741.89 U1.14
  Bottom Layer w10: v1(1405,687.42) 1405,690.13 1415,700.13 1415,1140 1430,1155 P1.5@1430,1205
MCU-RXD: CH340N.6 U1.44 | length 891.4
  Top Layer w10: CH340N.6 720,1019.65 cw(c730,1019.61) 729.96,1029.61 887.67,1029.61 cw(c887.67,1019.61) 897.67,1019.65 897.67,578.46 ccw(c907.67,578.46) 900.59,571.41 904.36,567.64 ccw(c911.41,574.72) 911.41,564.72 U1.44
MCU-TXD: CH340N.7 U1.43 | length 959.9
  Top Layer w10: CH340N.7 670,1038.73 cw(c680,1038.69) 680.02,1048.69 907.21,1048.69 cw(c907.21,1038.69) 917.21,1038.68 917.25,598 ccw(c927.25,598.02) 920.15,590.98 923.8,587.32 ccw(c930.86,594.41) 930.86,584.41 U1.43
NetLED0_1: LED0.1 R2.2 | length 80.5
  Top Layer w10: R2.2 2251.61,930.08 LED0.1
NetLED1_1: LED1.1 R6.2 | length 80.6
  Top Layer w10: R6.2 2251.53,735.16 LED1.1
NetPWR_1: PWR.1 R16.1 | length 81.8
  Top Layer w10: PWR.1 R16.1
NetQ1_1: Q1.1 R8.1 | length 199.7
  Top Layer w10: Q1.1 1882.4,795.04 ccw(c1892.4,795.04) 1885.31,787.99 1890.39,782.9 ccw(c1897.44,790) 1897.44,780 R8.1
NetQ1_2: Q1.2 R3.2 R5.2 | length 225.5
  Top Layer w10: R5.2 R3.2 1734.92,949.14 1740.78,955 1800,955 1807.6,947.4 Q1.2
nRESET: C8.2 LCD.3 R15.1 RESET.2 U1.7 | length 1614.2
  Top Layer w10: U1.7 1591.91,604.09 ccw(c1591.91,614.09) 1598.96,607 1626.75,634.79 cw(c1633.82,627.72) 1633.82,637.72 v1@1973.31,637.72 ; RESET.2@1934.45,1119.72 v1(2025,1119.72) RESET.2@2115.55,1119.72 ; v1(1973.94,638.35) 2044.21,638.35 ccw(c2044.21,648.35) 2051.27,641.27 2056.38,646.38 ccw(c2049.3,653.44) 2059.3,653.44 2059.3,835.04 ccw(c2049.3,835) 2049.3,845 C8.2 R15.1 2024.92,954.92 v1(2025,955) ; v1(2070,415) 2070,407.7 ccw(c2080,407.7) 2072.91,400.65 2076.47,397.09 ccw(c2083.53,404.17) 2083.53,394.17 2109.23,394.17 ccw(c2109.23,404.17) 2110.71,394.28 2118.74,395.49 cw(c2120.22,385.6) 2121.06,395.56 LCD.3
  Bottom Layer w10: v1(1973.94,638.35) cw(c1978.59,629.5) 1978.54,639.5 2060,639.5 cw(c2060,629.5) 2070,629.5 v1(2070,415) ; v1(2025,955) v1(2025,1119.72)
OSC32_IN: C3.2 U1.5 Y2.2 | length 411.7
  Top Layer w10: U1.5 1758.21,564.72 cw(c1758.21,554.72) 1766.93,559.63 cw(c1746.44,548.15) 1769.92,548.14 ; Y2.2 1740,396.77 1740,445.9 cw(c1750,445.86) 1742.89,452.89 1766.44,476.44 ccw(c1757.88,484.91) 1769.92,484.91 C3.2 1769.92,548.09
OSC32_OUT: C4.2 U1.6 Y2.1 | length 502.8
  Top Layer w10: U1.6 1818.02,584.41 cw(c1818.09,556.79) 1837.59,576.34 1839.18,574.75 cw(c1831.59,567.03) 1842.42,567.03 ; 1842.42,566.99 1842.42,515.75 C4.2 1845.08,484.06 ccw(c1855.08,484.06) 1847.99,477.01 1855.75,469.25 1872.09,452.91 cw(c1865,445.86) 1875,445.9 ; 1875,445.86 1875,401.77 Y2.1
PA8: P1.14 U1.42 | length 1124.5
  Top Layer w10: 530,1087.07 ccw(c547.07,1087.07) 535.06,1074.94 539.34,1070.66 ccw(c546.37,1077.77) 546.29,1067.77 546.37,1067.77 926.71,1067.77 cw(c926.71,1057.77) 936.71,1057.77 936.71,619.72 ccw(c946.71,619.72) 939.62,612.67 945.27,607.02 ccw(c952.34,614.09) 952.34,604.09 U1.42 ; 530,1087.12 P1.14
PA15: P2.11 U1.51 | length 681.5
  Top Layer w10: P2.11 830,170.84 cw(c840,170.79) 839.96,180.79 1155.88,180.79 ccw(c1155.88,190.79) 1162.95,183.72 1204,224.77 ccw(c1196.89,231.8) 1206.89,231.8 U1.51
PB3: P2.6 U1.56 | length 346.6
  Top Layer w10: U1.56 1305.32,110.25 ccw(c1315.32,110.25) 1308.23,103.19 1327.09,84.33 cw(c1320,77.28) 1330,77.28 P2.6
PB4: P2.5 U1.57 | length 431.7
  Top Layer w10: U1.57 1325,138.58 ccw(c1339.07,138.58) 1339.07,124.5 1419.42,124.5 cw(c1419.42,113.93) 1430,113.93 P2.5
PB5: P2.4 U1.58 | length 510.4
  Top Layer w10: U1.58 1344.69,165.25 ccw(c1362.9,165.25) 1362.9,147.03 1520,147.03 cw(c1520,137.03) 1530,137.08 P2.4
PB6: P2.3 U1.59 | length 591.9
  Top Layer w10: 1364.37,183.02 ccw(c1378.09,183.02) 1377.95,169.3 1378.03,169.3 1602.64,169.3 cw(c1603.43,-13.02) 1620.96,168.46 cw(c1620,158.5) 1630,158.55 P2.3 ; 1364.37,183.06 U1.59
PC6: P1.10 U1.38 | length 668.1
  Top Layer w10: P1.10@930,1205 930,1154.21 ccw(c940,1154.21) 940,1144.21 1005.7,1144.21 cw(c1005.7,1134.21) 1015.7,1134.26 1015.7,692.79 ccw(c1025.7,692.83) 1025.65,682.83 U1.38
PC7: P1.11 U1.39 | length 791.6
  Top Layer w10: P1.11@830,1205 829.53,1204.53 ccw(c836.6,1197.46) 826.6,1197.46 826.6,1134.64 ccw(c836.6,1134.64) 836.6,1124.64 985.5,1124.64 cw(c985.5,1114.64) 995.5,1114.69 995.5,673.38 ccw(c1005.5,673.43) 1005.46,663.43 U1.39@1088.5,663.43
PD2: P2.7 U1.55 | length 359.4
  Top Layer w10: P2.7 1230,119.81 cw(c1240,119.76) 1232.89,126.8 1282.74,176.64 ccw(c1275.63,183.68) 1285.63,183.68 U1.55
SPI2-MISO: P1.8 U1.36 | length 678.8
  Top Layer w10: U1.36 1188.08,722.2 cw(c1188.08,712.2) 1195.51,718.89 1196.12,718.23 cw(c1188.68,711.53) 1198.67,711.01 v1(1197.54,689.51)
  Bottom Layer w10: P1.8@1130,1205 1130,1201.6 ccw(c1140,1201.6) 1132.9,1194.55 1186.15,1141.31 cw(c1179.08,1134.24) 1189.08,1134.28 ; 1189.08,1134.24 1189.08,716.28 ccw(c1236.31,716.49) v1(1197.54,689.51)
SPI2-MOSI: P1.9 U1.37 | length 717.5
  Top Layer w10: U1.37 1152.48,702.52 v1@1165,690
  Bottom Layer w10: P1.9@1030,1205 1030,1149.94 ccw(c1040,1150) 1039.94,1140 1142.26,1140 ; 1142.3,1140 cw(c1142.39,1117.24) 1164.89,1120.66 cw(c1155,1119.19) 1165,1119.19 v1@1165,690
  other v1: 1165,689.51
SPI2-NSS: P1.6 U1.34 | length 675.3
  Top Layer w10: U1.34 1210.9,761.57 cw(c1210.9,751.57) 1211,761.57 v1(1240.91,761.28)
  Bottom Layer w10: v1(1240.91,761.28) cw(c1249.63,766.16) 1239.63,766.08 1238.73,1118.55 cw(c1272.19,1118.6) 1244.93,1138 cw(c1253.08,1132.2) 1253.04,1142.2 1320.04,1142.2 ccw(c1320,1152.2) 1330,1152.2 P1.6@1330,1205
SPI2-SCK: P1.7 U1.35 | length 720.2
  Top Layer w10: U1.35 1219.98,741.89 cw(c1219.98,731.89) 1227.04,738.98 1232.09,733.93 cw(c1225,726.87) 1235,726.87 v1@1235,690
  Bottom Layer w10: P1.7@1230,1205 cw(c1221.52,1199.7) 1231.52,1199.7 1231.52,1160.08 ; 1231.52,1160.07 cw(c1221.52,1160.08) 1228.61,1153.03 1218.28,1142.69 ccw(c1225.38,1135.66) 1215.38,1135.7 1215.38,713.76 ccw(c1225.38,713.76) 1218.31,706.69 1235,690 v1(1235,689.51)
SPI3-MISO: P2.9 U1.53 | length 507.2
  Top Layer w10: P2.9 1030,127.73 ; 1030,127.78 cw(c1042.32,127.76) 1042.3,140.08 1042.36,140.08 1173.6,140.08 ccw(c1173.6,150.08) 1180.65,142.99 1243.37,205.71 ccw(c1236.26,212.74) 1246.26,212.74 U1.53
SPI3-MOSI: P2.8 U1.54 | length 438.3
  Top Layer w10: P2.8@1130,55 1130,109.82 cw(c1140,109.78) 1139.96,119.78 1185.48,119.78 ccw(c1185.48,129.78) 1192.55,122.7 1263.05,193.21 ccw(c1255.95,200.25) 1265.95,200.25 U1.54
SPI3-SCK: P2.10 U1.52 | length 596.2
  Top Layer w10: P2.10 930,150.48 cw(c941.8,150.47) 941.78,162.27 1168.39,162.27 ccw(c1168.39,172.27) 1175.46,165.2 1223.68,213.42 ccw(c1216.58,220.45) 1226.58,220.45 U1.52
SWCLK: P2.12 U1.50 | length 722.9
  Top Layer w10: P2.12 796.66,136.66 ccw(c789.58,143.73) 799.58,143.73 799.59,189.11 cw(c809.59,189.11) 809.59,199.11 1139.96,199.11 ccw(c1139.96,209.11) 1147.04,202.04 1184.31,239.31 ccw(c1177.21,246.35) 1187.21,246.35 U1.50
SWDIO: P2.13 U1.49 | length 852.6
  Top Layer w10: P2.13@630,55 630,133.82 cw(c640,133.77) 639.96,143.77 757.82,143.77 ccw(c757.82,153.77) 767.82,153.77 767.82,207.54 cw(c777.82,207.54) 777.82,217.54 1123.4,217.54 ccw(c1123.4,227.54) 1130.47,220.47 1164.63,254.63 ccw(c1157.52,261.66) 1167.52,261.66 U1.49
USB+: R4.2 U1.46 | length 882.2
  Top Layer w10: R4.2 560,830 577.07,847.07 cw(c584.14,840) 584.14,850 843.63,850 cw(c843.63,840) 853.63,840.04 853.63,544.81 ccw(c863.63,544.87) 856.51,537.85 866.12,528.24 ccw(c873.15,535.35) 873.08,525.35 U1.46
USB-: R9.2 U1.45 | length 886.4
  Top Layer w10: R9.2 555,895 577.07,872.93 ccw(c584.14,880) 584.14,870 866.89,870 cw(c866.89,860) 876.89,860.04 876.89,561.38 ccw(c886.89,561.45) 879.78,554.42 886.27,547.92 ccw(c893.3,555.04) 893.23,545.04 U1.45
USBDN: R9.1 USB.A7 USB.B7 | length 274.8
  Top Layer w10: USB.A7 378.35,853.35 384.26,859.26 384.26,892.72 ; USB.B7 384.26,892.72 ; R9.1 462.8,892.72 384.26,892.72
USBDP: R1.1 R4.1 USB.A6 USB.B6 | length 409.5
  Top Layer w10: USB.A6 235.86,873.04 230,867.18 230,840 236.33,833.67 USB.B6 461.41,833.67 R4.1 R1.1
VCC-3V3: C1.1 C6.2 C7.2 C9.2 C10.2 C11.2 C12.2 C13.2 CH340N.5 CH340N.8 KEY.1 L1.1 LCD.7 P1.1 P1.2 P2.1 P2.2 Q1.3 R1.2 R2.1 R5.1 R6.1 R15.2 R16.2 U1.1 U1.16 U1.32 U1.48 U1.64 U2.5 U5.6 | length 3250.2
  Top Layer w10: C7.2@525,970.75 C7.2 C7.2@528.07,956.85 ; U5.6 649.14,472.4 659.92,483.18 R16.2 C13.2@732.6,560 ; CH340N.8 620,921.67 ccw(c628.04,915.72) 618.04,915.72 618.04,899.96 ccw(c628.04,900) 628,890 764.14,890 770,895.86 CH340N.5 ; U2.5 733.85,487.43 U2.5@737.59,491.17 ; v1(985,445) 985,484.92 C6.2 985.91,485.98 U1.48 ; C12.2 1167.52,962.56 U1.32 ; C9.2@1457.5,302.42 1462.8,309.88 U1.64 1462.8,477.8 1470.98,485.98 U1.1 ; U1.16 1673.82,781.26 C1.1 ; R5.1 C1.1 ; v1(1795,725) 1685,725 1675.08,734.92 C1.1 ; P2.1@1830,55 P2.1@1835.28,49.72 ; P2.1 1864.59,70 1884.86,49.72 1934.45,49.72 KEY.1@2115.55,49.72 ; v1(1840,725) 1840.52,734.44 ccw(c1830.54,735) 1840.54,735 1840.54,798.07 Q1.3 ; R15.2 v1(1965.08,949.32) ; v1(1990,365) cw(c1998.7,369.94) 1988.7,369.88 1988.83,435.09 1979.25,435.12 C10.2 ; C10.2@1994.92,445 2045,445 2072.09,472.09 2072.09,472.91 LCD.7 ; R6.1 v1(2190,835) ; R2.1 2190,1000.22 v1(2190.59,1033.56)
  Top Layer w12: C12.2@1155.25,965 C12.2 ; L1.1 v1(1300,1080)
  Top Layer w16: v1@524.84,1010.16 524.84,1019 cw(c540.84,1019) 540.84,1035 604,1035 cw(c604,1019) 613.6,1031.8 615.28,1030.35 ; C7.2@525,970.75 v1(525,1010) ; 615.31,1030.31 620,1025.63 CH340N.8 ; v1(1120,930) v1(1120,965) C12.2@1155.25,965
  Top Layer w18: v1@524.39,725.61 524.31,746.62 cw(c542.31,747) 524.31,747.22 524.47,760.49 cw(c542.47,760.27) 524.6,762.47 R1.2 524.92,747.22 ; R16.2 R16.2@660,560.08 ; 717.71,535.02 717.71,516.82 732.6,501.93 U2.5 U2.5@732.6,482.4 ; U2.5@733.85,487.43 733.85,545.53 cw(c751.85,545.53) 739.12,558.26 740.08,559.21 C13.2 740.16,559.92 cw(c727.43,547.19) 745.43,547.19 745.43,506.47 cw(c727.43,506.47) 740.16,493.74 U2.5@737.59,491.17 ; C9.2 C11.2 1531.75,299.24 v1(1569.49,299.24) v1(1605,300)
  Top Layer w20: v1(1300,1080) v1(1300,1115)
  Top Layer w24: P2.2@1730,55 P2.1@1830,55 ; v1(1795,725) 1816.59,724.99 1821.36,724.99 v1(1840,725) v1(1880,725) ; v1(1990,315) v1(1990,365)
  Bottom Layer w10: P2.2@1727.09,67.91 cw(c1720,60.86) 1730,60.86 P2.2@1730,55 ; P2.1@1830,55 P2.1@1854.53,79.53 ; v1@1988.87,312.83 v1(1990,315)
  other v1: 710,605 745,605 710,635 745,635 710,665 745,665 525,725
VCC-5V: R7.1 U5.3 UART.A4B9 UART.A9B4 USB.A4B9 USB.A9B4 | length 2284.4
  Top Layer w8: R7.1 513.26,310 ccw(c513.26,328.92) 522.55,312.44 ; U5.3 507.38,396.95 518.62,396.95 cw(c518.62,388.95) 526.62,388.95 526.62,319.37 cw(c518.62,319.41) 522.59,312.46
  Top Layer w12: 167.36,324.06 171.42,320 250.03,320 cw(c250.03,308) 258.51,316.49 268.04,306.96 ; 168.76,775.79 174.45,775.79 251.37,775.79 cw(c251.44,763.79) 257.06,774.39 ; 170,474.44 170.56,475 ; 174.45,781.49 cw(c182.93,773) 182.93,785 254.67,785 cw(c254.67,773) 263.16,781.49 268.55,776.09 cw(c260.11,767.56) 268.64,776 269.15,775.49 270.23,774.41 ; 195,310 196.78,308.22 255.68,308.22 256.94,306.96 ; 196.41,945.44 189.87,949.78 253.68,949.78 ; 201.63,941.98 ccw(c208.23,952) 208.23,940 250.03,940 ccw(c250.03,952) 258.51,943.51 264.78,949.78 ; UART.A9B4@299.91,306.96 268.04,306.96 ; UART.A9B4 304.57,300 263.9,300 256.94,306.96 ; 406.34,301.34 406.15,301.15 467.1,301.15 R7.1 R7.1@470.95,315 ; 170.56,475 177.78,482.22 256.51,482.22 258.73,484.44 ; 170.56,475 251.7,475 258.73,482.03 258.73,484.44 ; 253.68,949.78 264.78,949.78 ; 253.68,949.78 266.95,963.05 300.35,963.05 USB.A4B9 300.03,952 267.42,952 265.2,949.78 264.78,949.78 ; 256.94,306.96 268.04,306.96 ; 257.06,774.39 300.03,774.39 USB.A9B4 305.24,768.23 263.23,768.23 257.06,774.39 ; 258.73,484.44 264.64,490.36 305.49,490.36 UART.A4B9 300.03,484.44 258.73,484.44
  Top Layer w18: UART.A9B4@305.91,301.34 385,301.34 ; R7.1@461.32,321.14 470.95,315 398.66,315 385,301.34 ; R7.1@466.91,301.34 406.34,301.34 385,301.34
  Top Layer w24: 167.36,324.06 167.36,750.59 ; 167.36,752.99 167.36,919.37 cw(c191.36,919.37) 189.77,943.32 190.21,943.34 cw(c191.88,919.4) 190.29,943.35 204.93,944.32 ; 169.76,475.21 170,474.44 ; 171.42,320 ccw(c186.18,338.92) 186.11,314.92 195.77,314.92 ; UART.A9B4 UART.A9B4@305.91,301.34 ; R7.1@466.91,301.34 R7.1@467.1,301.15
VCC-IN: C5.2 P2.14 R7.2 U2.1 U2.3 U5.4 | length 829.2
  Top Layer w8: U5.4 562.62,396.48 551.17,396.48 ccw(c551.17,388.48) 543.17,388.51 543.17,318.85 ccw(c551.17,318.89) 547.66,311.7 ccw(c555.01,326.77) 555.01,310 R7.2 ; U2.1 732.6,425.31 737.28,430 800,430 807.4,422.6 U2.3
  Top Layer w12: P2.14@530,55 530,131.55 cw(c542,131.51) 533.47,139.95 590.58,197.06 ccw(c582.06,205.5) 594.06,205.5 R7.2
  Top Layer w24: R7.2 C5.2 732.79,312.29 732.79,383.63 U2.1
VOUT: U1.33 U5.1 | length 1118.8
  Top Layer w10: v1(430,470) 461.26,470 U5.1 ; U1.33 1136.26,781.26 v1(1140,785)
  Bottom Layer w16: v1(430,470) 430,527.91 cw(c440,527.87) 440.04,537.87 920,537.87 ccw(c920,547.87) 930,547.87 930,775 cw(c940,775) 940,785 v1(1140,785)
VREF: C2.2 L1.2 U1.28 U1.29 | length 258.6
  Top Layer w10: U1.29 1226.58,930 ; U1.28 1246.26,910.32 1226.58,930 ; L1.2 1290.55,965.08 C2.2 1226.58,961.65 1226.58,930
pads on no net: CH340N.4 H1.4 H1.5 H1.6 H1.7 H1.8 H1.9 H1.10 H1.11 H1.12 H2.4 H2.5 H2.6 H2.7 H2.8 H2.9 H2.10 H2.11 H2.12 H3.4 H3.5 H3.6 H3.7 H3.8 H3.9 H3.10 H3.11 H3.12 H4.4 H4.5 H4.6 H4.7 H4.8 H4.9 H4.10 H4.11 H4.12 LCD.9 LCD.10 U1.2 U1.3 U1.4 U1.8 U1.9 U1.22 U1.23 U1.24 U1.25 U1.26 U1.30 U1.60 U1.62 U2.4 UART.13 UART.14 UART.15 UART.16 UART.22 UART.23 UART.A5 UART.A8 UART.B5 UART.B8 USB.13 USB.14 USB.15 USB.16 USB.22 USB.23 USB.A5 USB.A8 USB.B5 USB.B8

## Polygon pours and split planes (outlines as drawn)
GND on Top Layer "GND_L01_P003" (solid, remove dead copper, pour order 3): 15,132.5 ccw(c130,132.5) 130,17.5 2220,17.5 ccw(c2225,137.5) 2345,132.5 2345,1127.5 ccw(c2225,1127.5) 2225,1247.5 130,1247.5 ccw(c130,1132.5) 15,1132.5
VCC-3V3 on Top Layer "VCC-3V3_L01_P004" (solid, pour order 4): 765,535 717.71,535.02 690,535 685,540 685,685 690,690 765,690 770,685 770,540
GND on Bottom Layer "GND_L04_P002" (solid, pour order 2): 12.5,130 ccw(c127.5,130) 127.5,15 2217.5,15 ccw(c2222.5,135) 2342.5,130 2342.5,1125 ccw(c2222.5,1125) 2222.5,1245 127.5,1245 ccw(c127.5,1130) 12.5,1130
VCC-3V3 on PWR (split plane): 2263.78,1239.53 2264.4,1239.59 2271.45,1239.25 2279.05,1238.12 2285,1236.63 2285,1220 2305,1220 2305,1227.8 2307.28,1226.43 2313.45,1221.85 2319.14,1216.69 2324.3,1211 2328.88,1204.83 2331.77,1200 2325,1200 2325,1180 2339.72,1180 2340.57,1176.6 2341.7,1169 2342.05,1161.95 2341.99,1161.33 2342.11,1160.09 2342.11,100.57 2341.9,98.43 2341.96,97.81 2341.61,90.75 2340.48,83.15 2339.69,80 2325,80 2325,60 2331.83,60 2328.79,54.93 2324.21,48.75 2319.05,43.06 2313.36,37.9 2307.19,33.32 2305,32.01 2305,40 2285,40 2285,23.14 2278.97,21.63 2271.36,20.51 2264.31,20.16 2263.69,20.22 2262.45,20.1 100.58,20.1 98.43,20.31 97.81,20.25 90.75,20.59 83.15,21.72 80,22.51 80,35 60,35 60,30.37 54.93,33.41 48.75,37.99 43.06,43.15 37.9,48.84 33.32,55.02 30.34,60 40,60 40,85 21.37,85 20.51,90.84 20.16,97.9 20.22,98.51 20.22,98.52 20.1,1159.27 20.31,1161.42 20.25,1162.03 20.59,1169.09 21.72,1176.69 22.55,1180 40,1180 40,1210 37.18,1210 37.99,1211.09 43.15,1216.78 48.84,1221.94 55,1226.51 55,1220 80,1220 80,1237.4 83.24,1238.21 90.84,1239.34 97.9,1239.68 98.51,1239.62 99.76,1239.75 2261.63,1239.75
GND on GND (split plane): 2263.78,1239.53 2264.4,1239.59 2271.45,1239.25 2279.05,1238.12 2285,1236.63 2285,1220 2305,1220 2305,1227.8 2307.28,1226.43 2313.45,1221.85 2319.14,1216.69 2324.3,1211 2328.88,1204.83 2331.77,1200 2330,1200 2330,1180 2339.72,1180 2340.57,1176.6 2341.7,1169 2342.05,1161.95 2341.99,1161.33 2342.11,1160.09 2342.11,100.57 2341.9,98.43 2341.96,97.81 2341.61,90.75 2340.48,83.15 2339.69,80 2320,80 2320,55 2328.84,55 2328.79,54.93 2324.21,48.75 2319.05,43.06 2313.36,37.9 2307.19,33.32 2305,32.01 2305,35 2280,35 2280,21.89 2278.97,21.63 2271.36,20.51 2264.31,20.16 2263.69,20.22 2262.45,20.1 100.58,20.1 98.43,20.31 97.81,20.25 90.75,20.59 83.15,21.72 80,22.51 80,35 55,35 55,33.37 54.93,33.41 48.75,37.99 43.06,43.15 37.9,48.84 33.32,55.02 30.34,60 35,60 35,80 22.44,80 21.63,83.24 20.51,90.84 20.16,97.9 20.22,98.51 20.22,98.52 20.1,1159.27 20.31,1161.42 20.25,1162.03 20.59,1169.09 21.72,1176.69 22.55,1180 35,1180 35,1200 30.47,1200 33.41,1204.92 37.99,1211.09 43.15,1216.78 48.84,1221.94 55.01,1226.52 60,1229.51 60,1220 80,1220 80,1237.4 83.24,1238.21 90.84,1239.34 97.9,1239.68 98.51,1239.62 99.76,1239.75 2261.63,1239.75

## Other copper
GND (plane layer: these items are gaps in the copper):
  rectangle: 2330,1180 2340,1200
  rectangle: 2285,1220 2305,1240
  rectangle: 2320,55 2345,80
  rectangle: 2280,20 2305,35
  rectangle: 20,60 35,80
  rectangle: 55,20 80,35
  rectangle: 20,1180 35,1200
  rectangle: 60,1220 80,1240
PWR (plane layer: these items are gaps in the copper):
  rectangle: 2285,20 2305,40
  rectangle: 2325,60 2340,80
  rectangle: 2285,1220 2305,1240
  rectangle: 2325,1180 2340,1200
  rectangle: 0,1180 40,1210
  rectangle: 55,1220 80,1250
  rectangle: 20,60 40,85
  rectangle: 60,20 80,35

## Silkscreen, mask and mechanical layers (free items; w line width, h text height)
Top Overlay:
  lines w10: 860,260 1120,260 1190,330 1340,330 ; 2170,1070 2170,1255
  text "GND" at 326,1093 h30
  text "PA8" at 451,1093 h30
  text "SDA" at 556,1093 h30
  text "SCL" at 661.93,1088 h30
  text "PC7" at 773.91,1088 h30
  text "PC6" at 885.89,1088 h30
  text "SMO" at 997.86,1088 h30
  text "SMI" at 1109.84,1088 h30
  text "SCK" at 1211.82,1088 h30
  text "NSS" at 1323.8,1088 h30
  text "CH3" at 1435.77,1088 h30
  text "CH2" at 1547.75,1088 h30
  text "CH1" at 1659.73,1088 h30
  text "3V3" at 1761.71,1088 h30
  text "STM32G431" at 861,281 h30
  text "GND" at 341,138 h30
  text "VIN" at 456,138 h30
  text "DIO" at 560.45,138 h30
  text "SCK" at 664.9,138 h30
  text "PAF" at 774.35,138 h30
  text "SCK" at 883.8,138 h30
  text "SMI" at 993.25,138 h30
  text "SMO" at 1092.7,138 h30
  text "PD2" at 1202.15,138 h30
  text "PB3" at 1311.6,138 h30
  text "PB4" at 1421.05,138 h30
  text "PB5" at 1530.5,138 h30
  text "PB6" at 1639.95,138 h30
  text "3V3" at 1746,138 h30
Mechanical 1:
  lines w5: 0,98.51 0,1161.42 ; 0,629.97 0.03,630 ; 0.12,98.51 ccw(c98.43,98.51) 98.43,0.21 ; 0.21,1161.42 cw(c98.51,1161.42) 98.51,1259.72 ; 98.43,0 2263.69,0 ; 98.51,1259.84 2263.78,1259.84 ; 2263.69,0.12 ccw(c2263.69,98.43) 2361.99,98.43 ; 2263.78,1259.63 cw(c2263.78,1161.33) 2362.08,1161.33 ; 2362.08,630 2362.2,629.88 ; 2362.2,98.43 2362.2,1161.33